# EAGLE board 2wire-1602-v0 (EAGLE 5.07)
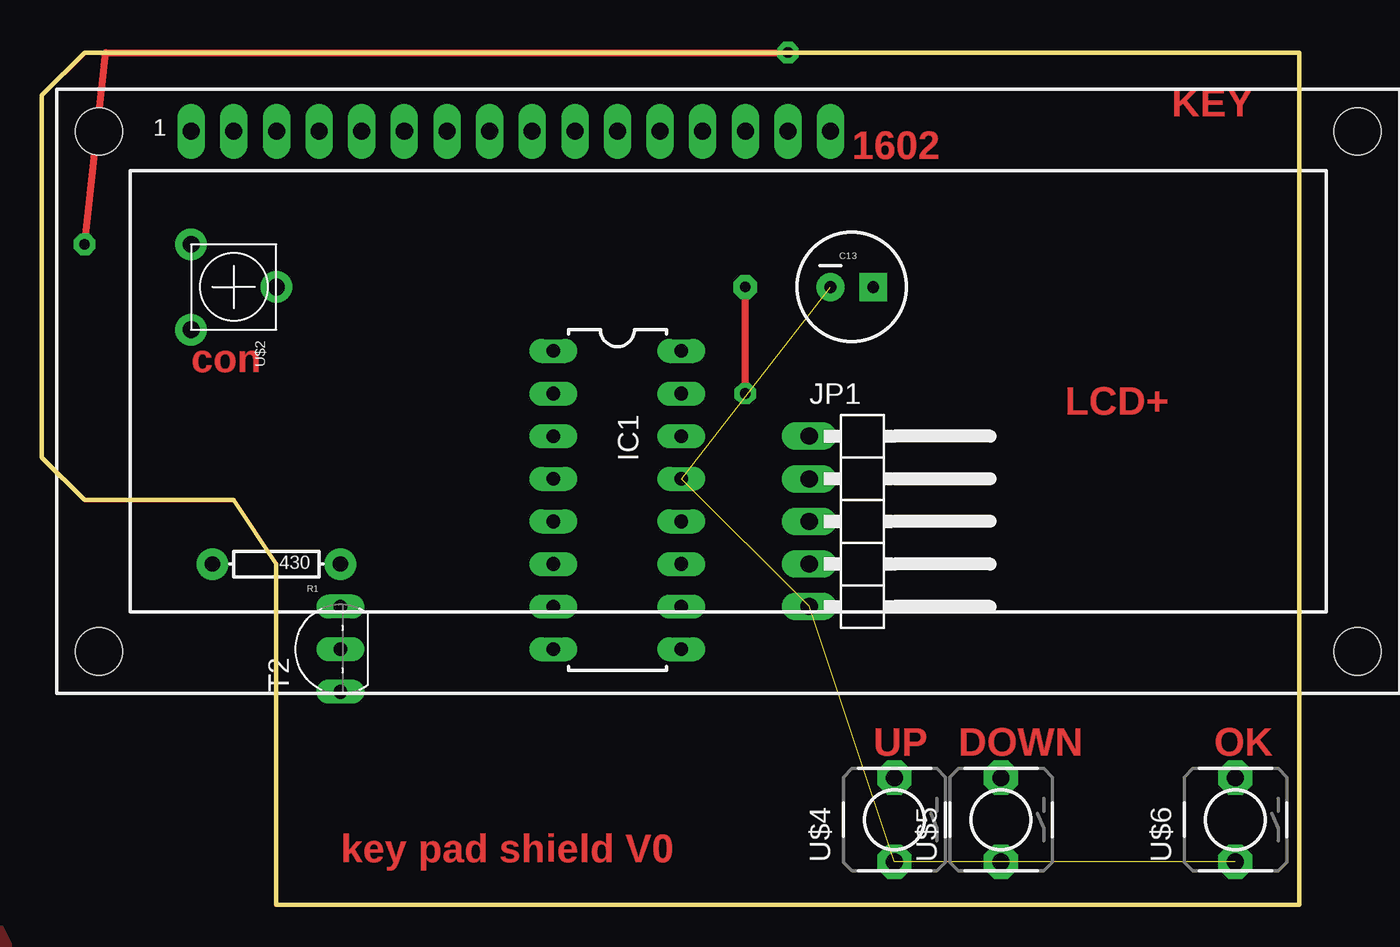
[diagram p0: board, top side]
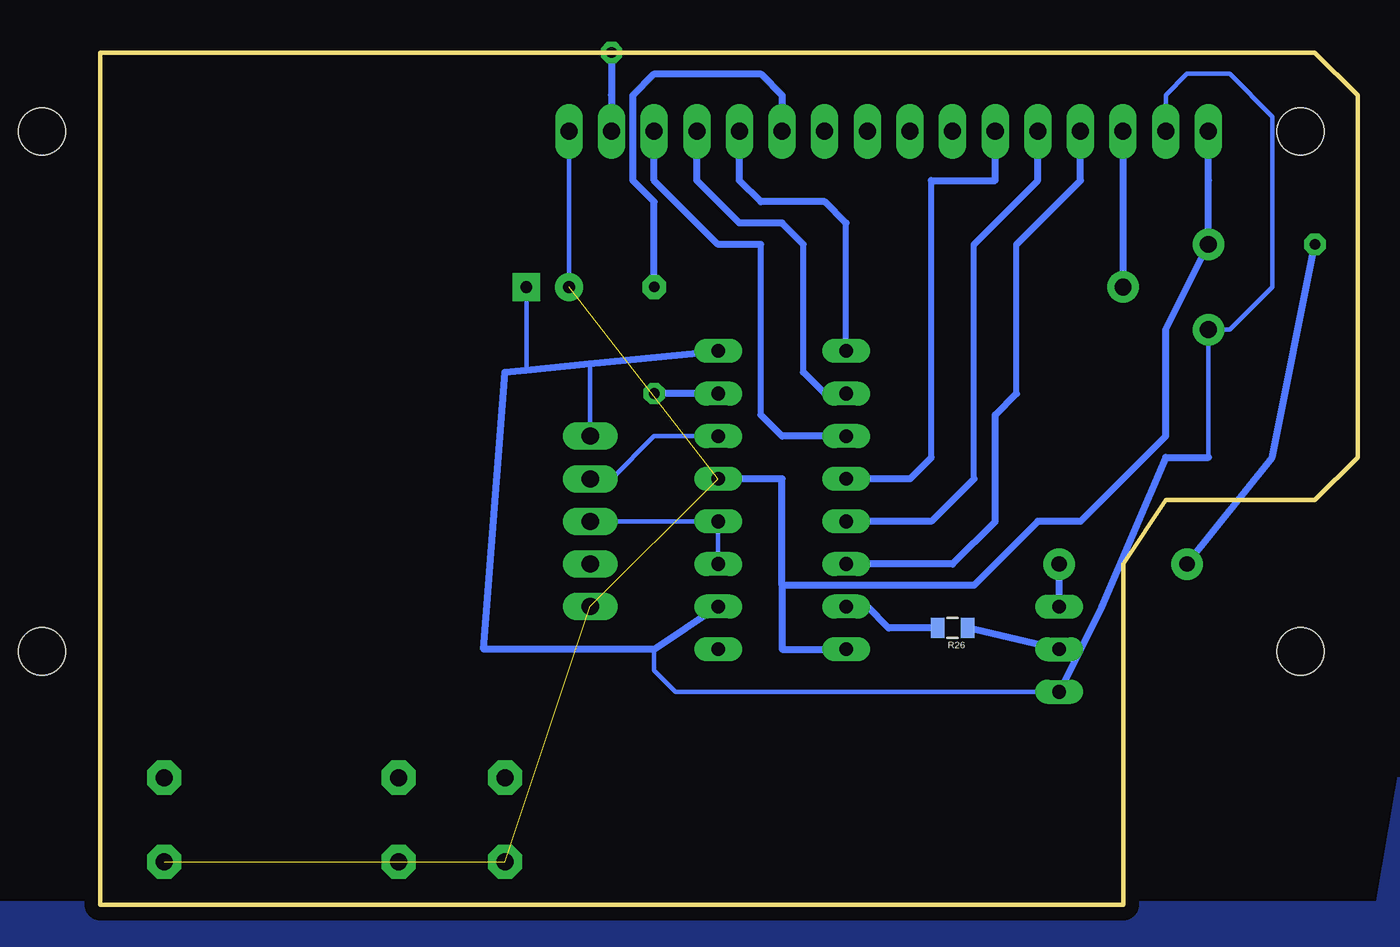
[diagram p1: board, bottom side, seen from below]

Size 74.93 x 50.8 mm. Coordinates in mm from the lower left corner, seen from the top.
Outline: 13.97,0 74.93,0 74.93,50.8 2.54,50.8 0,48.26 0,26.67 2.54,24.13 11.43,24.13 13.97,20.32 13.97,0
Copper layers (1*16): Top 0.035mm / dielectric 1.5mm / Bottom 0.035mm
Design rules "SparkFun": minimum track width 8mil, minimum drill 20mil, track to track 8mil, track to pad 8mil, pad to pad 8mil, via to via 8mil, smd to smd 8mil, copper to edge 10mil, drill to drill 8mil, minimum pad ring 12mil, minimum via ring 10mil, stop-mask expansion 4mil, vias tented up to drill 25mil, thermal gap 10mil

## Footprints (pad centres in the part's own frame; a part is rotated, then mirrored left to right if it is on the bottom)
CPOL-RADIAL-100UF-25V = drill 0.7 pad 1.651 square: 1 1.27,0 | drill 0.7 pad 1.651 round: 2 -1.27,0
DIL16 = drill 0.813 long: 1 -8.89,-3.81; 2 -6.35,-3.81; 3 -3.81,-3.81; 4 -1.27,-3.81; 5 1.27,-3.81; 6 3.81,-3.81; 7 6.35,-3.81; 8 8.89,-3.81; 9 8.89,3.81; 10 6.35,3.81; 11 3.81,3.81; 12 1.27,3.81; 13 -1.27,3.81; 14 -3.81,3.81; 15 -6.35,3.81; 16 -8.89,3.81
1X05/90 = drill 1.016 long: 1 -5.08,-3.81; 2 -2.54,-3.81; 3 0,-3.81; 4 2.54,-3.81; 5 5.08,-3.81
AXIAL-0.3 = drill 0.9 pad 1.88 round: P$1 -3.81,0; P$2 3.81,0
0805 = smd 0.8 x 1.2: 1 -0.9,0; 2 0.9,0
TO92-EBC = drill 0.813 long: B 0,-1.27; C 2.54,-1.27; E -2.54,-1.27
LCD-16X2 = drill 1.016 long: 1 -32,15.5; 2 -29.46,15.5; 3 -26.92,15.5; 4 -24.38,15.5; 5 -21.84,15.5; 6 -19.3,15.5; 7 -16.76,15.5; 8 -14.22,15.5; 9 -11.68,15.5; 10 -9.14,15.5; 11 -6.6,15.5; 12 -4.06,15.5; 13 -1.52,15.5; 14 1.02,15.5; 15 3.56,15.5; 16 6.1,15.5 | hole 2.8: -37.5,15.5; -37.5,-15.5; 37.5,15.5; 37.5,-15.5
TRIM_POT_PTH = drill 1 pad 1.88 round: 1 -2.54,-2.54; 2 0,2.54; 3 2.54,-2.54
ALPS-SKHV = drill 1.016 pad 2.032 octagon: 2 -2.51,0; 3 2.51,0

## Placement (x,y rotation side)
C13  10u  [CPOL-RADIAL-100UF-25V]  48.26,36.83 0 top
IC1  74LS595N  [DIL16]  34.29,24.13 270 top
JP1  ext-lcd  [1X05/90]  49.53,22.86 270 top
R1  430  [AXIAL-0.3]  13.97,20.32 180 top
R26  1k  [0805]  24.13,16.51 180 bottom
T2  8550  [TO92-EBC]  16.51,15.24 90 top
U$1  LCD-16X2  [LCD-16X2]  40.89,30.61 0 top
U$2  10k  [TRIM_POT_PTH]  11.43,36.83 270 top
U$4  UP  [ALPS-SKHV]  50.8,5.08 90 top
U$5  DOWN  [ALPS-SKHV]  57.15,5.08 90 top
U$6  OK  [ALPS-SKHV]  71.12,5.08 90 top

## Library data of the parts
C13 IC1 U$2 = SparkFun
JP1 = pinhead
R1 R26 T2 U$1 U$4-U$6 = digital-toy

## Nets
GND: C13.2 IC1.8 IC1.13 JP1.5 U$1.1 U$1.16 U$2.1 U$4.2 U$5.2 U$6.2
N$1: IC1.15 U$1.11
N$2: IC1.1 U$1.12
N$3: IC1.2 U$1.13
N$4: IC1.3 U$1.14
N$5: IC1.4 U$1.6
N$6: IC1.5 U$1.5
N$7: IC1.6 U$1.4
N$8: IC1.7 R26.2
N$10: IC1.14 JP1.2
N$12: IC1.11 IC1.12 JP1.3
N$15: U$1.3 U$2.2
N$16: R1.P$2 U$1.15
N$19: R1.P$1 T2.C
N$55: R26.1 T2.B
VCC: C13.1 IC1.10 IC1.16 JP1.1 T2.E U$1.2 U$2.3

## Tracks (layer width: path | path; a pad name or v marks a point on that pad's centre or on a via)
GND  (5 unrouted)
  Bottom 0.254: C13.2 U$1.16
  Bottom 0.406: IC1.8 34.29,15.24 34.29,19.05 | 34.29,19.05 34.29,25.4 IC1.13 | 34.29,19.05 22.86,19.05 19.05,22.86 16.51,22.86 11.43,27.94 11.43,34.29 U$2.1 8.89,43.18 U$1.1
  pour Bottom (isolate 0.813): 86.36,0 88.9,2.54 88.9,-3.81 81.28,-2.54 76.2,-10.16 3.81,-8.89 -7.62,-6.35 -10.16,52.07 -1.27,0
  pour Top (isolate 0.813): -6.35,-19.05 90.17,-17.78 90.17,6.35 85.09,-5.08 -1.27,-3.81 -6.35,6.35
N$1  (via drill 0.64 pad 1.27, 0.64 pad 1.42)
  Top 0.406: v41.91,30.48 v41.91,36.83
  Bottom 0.406: IC1.15 v41.91,30.48 | v41.91,36.83 41.91,41.91 43.18,43.18 43.18,48.26 41.91,49.53 35.56,49.53 34.29,48.26 U$1.11
N$2
  Bottom 0.356: IC1.1 30.48,40.64
  Bottom 0.406: 30.48,40.64 31.75,41.91 35.56,41.91 36.83,43.18 U$1.12
N$3
  Bottom 0.356: 33.02,31.75 33.02,39.37
  Bottom 0.406: IC1.2 31.75,30.48 33.02,31.75 | 33.02,39.37 34.29,40.64 36.83,40.64 39.37,43.18 U$1.13
N$4
  Bottom 0.356: 35.56,29.21 35.56,39.37
  Bottom 0.406: IC1.3 34.29,27.94 35.56,29.21 | 35.56,39.37 38.1,39.37 41.91,43.18 U$1.14
N$5
  Bottom 0.356: 25.4,26.67 25.4,43.18
  Bottom 0.406: IC1.4 26.67,25.4 25.4,26.67 | 25.4,43.18 21.59,43.18 U$1.6
N$6
  Bottom 0.356: 22.86,25.4 22.86,39.37
  Bottom 0.406: IC1.5 25.4,22.86 22.86,25.4 | 22.86,39.37 19.05,43.18 U$1.5
N$7
  Bottom 0.356: 20.32,30.48 20.32,39.37
  Bottom 0.406: IC1.6 24.13,20.32 21.59,22.86 21.59,29.21 20.32,30.48 | 20.32,39.37 16.51,43.18 U$1.4
N$8
  Bottom 0.406: IC1.7 29.21,17.78 27.94,16.51 R26.2
N$10
  Bottom 0.254: IC1.14 41.91,27.94 44.45,25.4 JP1.2
N$12
  Bottom 0.254: IC1.11 IC1.12 JP1.3
N$15
  Bottom 0.406: U$1.3 13.97,43.18 U$2.2
N$16  (via drill 0.64 pad 1.27)
  Top 0.406: v2.54,39.37 3.81,50.8 v44.45,50.8
  Bottom 0.406: R1.P$2 5.08,26.67 v2.54,39.37 | v44.45,50.8 44.45,48.26 U$1.15
N$19
  Bottom 0.406: T2.C R1.P$1
N$55
  Bottom 0.406: T2.B R26.1
VCC
  Bottom 0.254: 8.89,26.67 U$2.3 7.62,34.29 5.08,36.83 5.08,46.99 7.62,49.53 10.16,49.53 11.43,48.26 U$1.2 | T2.E 40.64,12.7 41.91,13.97 41.91,15.24 | JP1.1 45.72,32.2 45.77,32.25 | C13.1 49.53,31.89 49.54,31.88
  Bottom 0.406: T2.E 15.24,17.78 11.43,26.67 8.89,26.67 | IC1.10 41.91,15.24 52.07,15.24 50.8,31.75 49.54,31.88 45.77,32.25 IC1.16

## Text on the board
Top: KEY | 1602 | con | LCD+ | UP | DOWN | OK | key pad shield V0